# EAGLE board main (EAGLE 9.5.0)
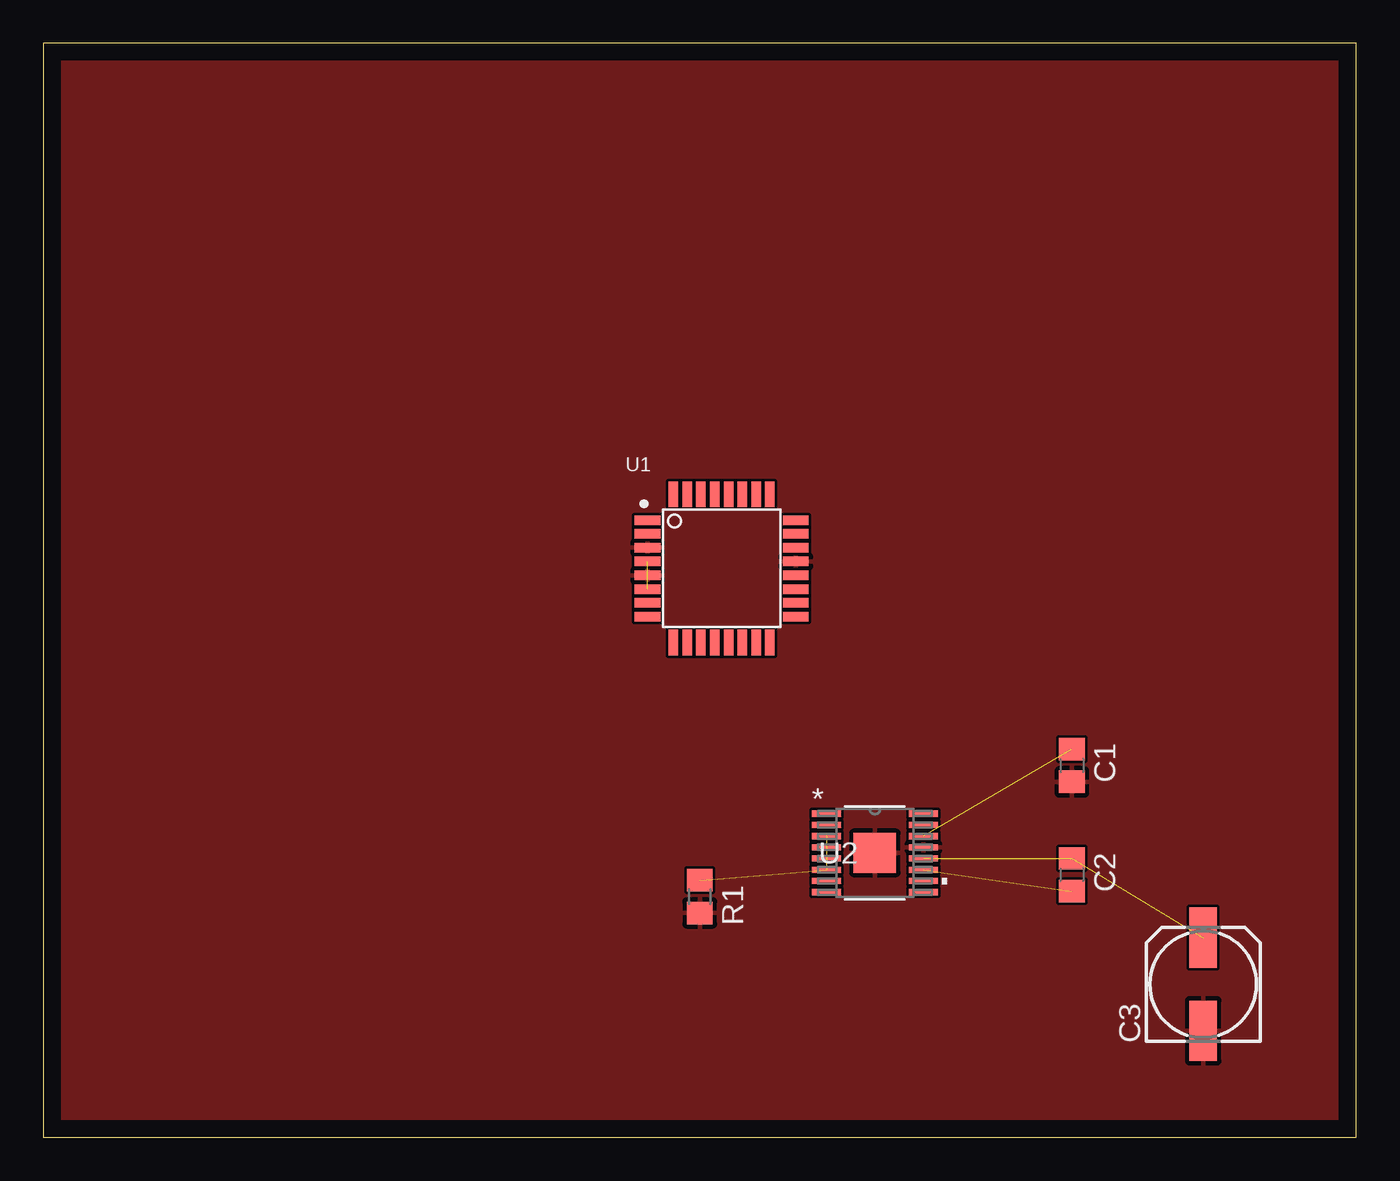
[diagram p0: board, top side]
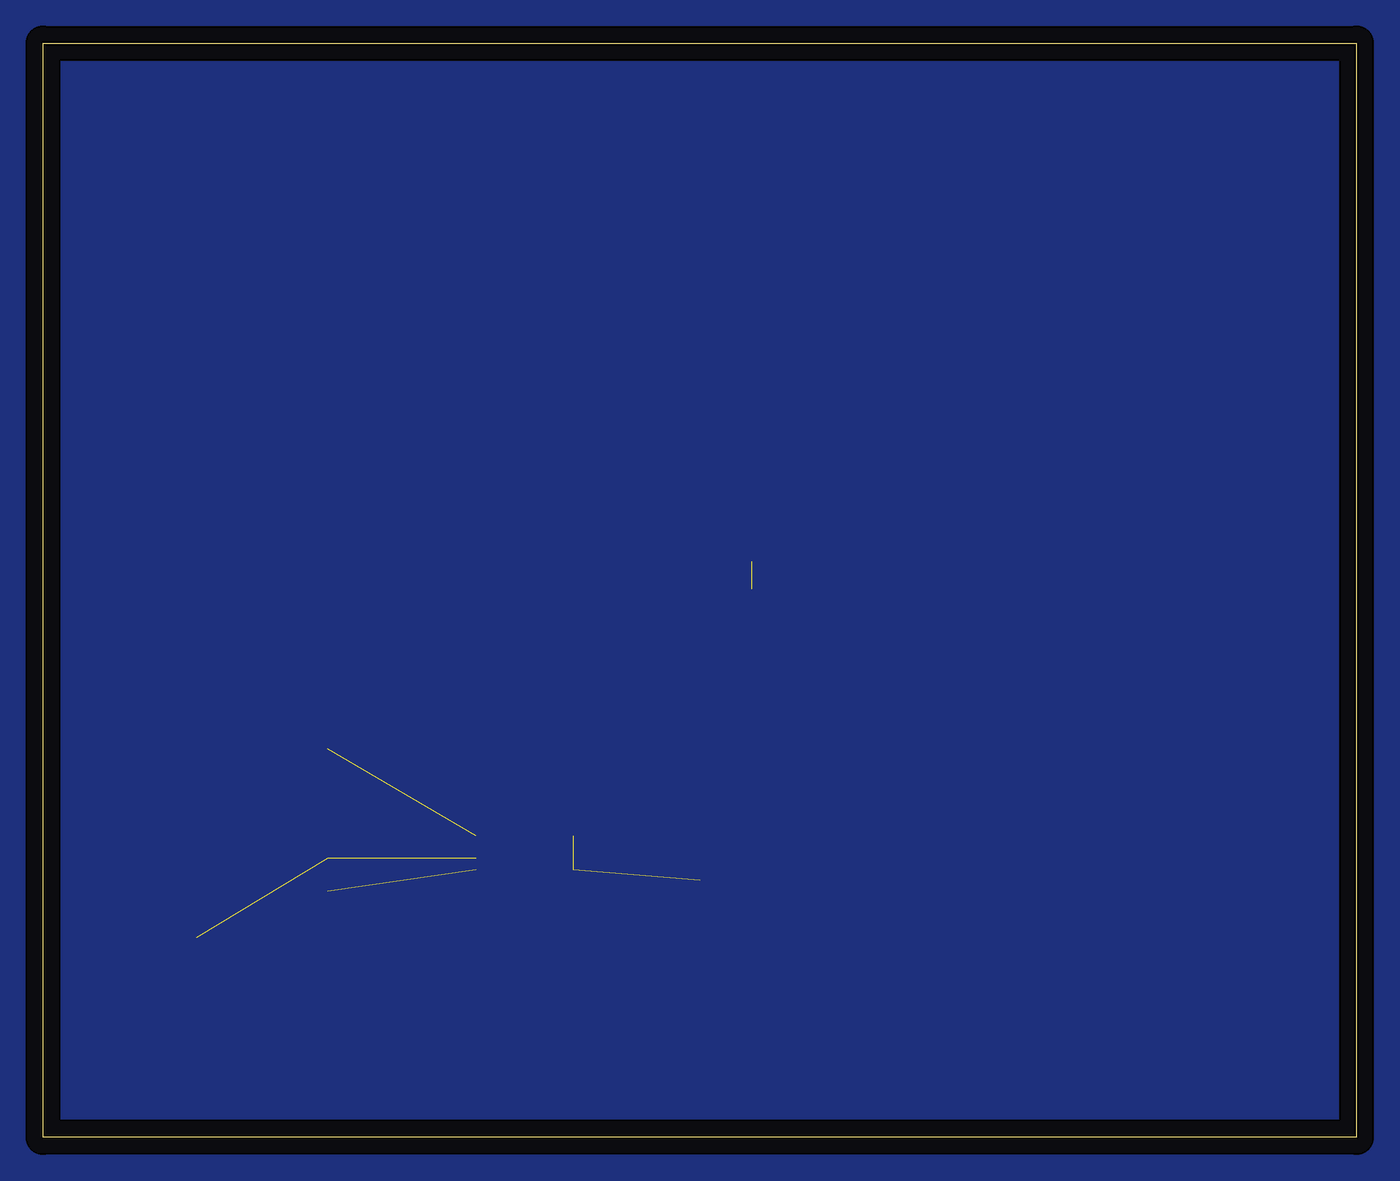
[diagram p1: board, bottom side, seen from below]

Size 76.2 x 63.5 mm. Coordinates in mm from the lower left corner, seen from the top.
Outline: 0,0 76.2,0 76.2,63.5 0,63.5 0,0
Copper layers (1*16): Top 0.035mm / dielectric 1.5mm / Bottom 0.035mm
Design rules "default": minimum track width 6mil, minimum drill 0.35mm, track to track 6mil, track to pad 6mil, pad to pad 6mil, via to via 6mil, smd to smd 6mil, copper to edge 40mil, drill to drill 6mil, minimum pad ring 10mil, minimum via ring 8mil, stop-mask expansion 4mil, vias tented up to drill 0mil, thermal gap 10mil

## Footprints (pad centres in the part's own frame; a part is rotated, then mirrored left to right if it is on the bottom)
C0805 = smd 1.3 x 1.5: 1 -0.95,0; 2 0.95,0
153CLV-0605 = smd 3.5 x 1.6: + 2.7,0; - -2.7,0
R0805 = smd 1.3 x 1.5: 1 -0.95,0; 2 0.95,0
QFP80P900X900X120-32N = smd 1.5 x 0.55: 1 -4.3,2.8; 2 -4.3,2; 3 -4.3,1.2; 4 -4.3,0.4; 5 -4.3,-0.4; 6 -4.3,-1.2; 7 -4.3,-2; 8 -4.3,-2.8; 17 4.3,-2.8; 18 4.3,-2; 19 4.3,-1.2; 20 4.3,-0.4; 21 4.3,0.4; 22 4.3,1.2; 23 4.3,2; 24 4.3,2.8 | smd 0.55 x 1.5: 9 -2.8,-4.3; 10 -2,-4.3; 11 -1.2,-4.3; 12 -0.4,-4.3; 13 0.4,-4.3; 14 1.2,-4.3; 15 2,-4.3; 16 2.8,-4.3; 25 2.8,4.3; 26 2,4.3; 27 1.2,4.3; 28 0.4,4.3; 29 -0.4,4.3; 30 -1.2,4.3; 31 -2,4.3; 32 -2.8,4.3
PWP16_2P31X2P46 = smd 1.676 x 0.356: 1 -2.819,2.275; 2 -2.819,1.625; 3 -2.819,0.975; 4 -2.819,0.325; 5 -2.819,-0.325; 6 -2.819,-0.975; 7 -2.819,-1.625; 8 -2.819,-2.275; 9 2.819,-2.275; 10 2.819,-1.625; 11 2.819,-0.975; 12 2.819,-0.325; 13 2.819,0.325; 14 2.819,0.975; 15 2.819,1.625; 16 2.819,2.275 | smd 2.46 x 2.31: EPAD 0,0
SOT95P284X119-5N = smd 1.27 x 0.533: 1 -1.219,0.94; 2 -1.219,0; 3 -1.219,-0.94; 4 1.219,-0.94; 5 1.219,0.94

## Placement (x,y rotation side)
C1  [C0805]  59.69,21.59 270 top
C2  [C0805]  59.69,15.24 270 top
C3  [153CLV-0605]  67.31,8.89 90 top
R1  0.2  [R0805]  38.1,13.97 270 top
U1  ATMEGA328P-AU  [QFP80P900X900X120-32N]  39.37,33.02 0 top
U2  DRV8833PWPR  [PWP16_2P31X2P46]  48.26,16.51 0 top
U3  LP2985IM5-5.0  [SOT95P284X119-5N]  3.81,-7.62 0 top  (outside the outline)

## Library data of the parts
C1-C3 = rcl; SPICEPREFIX: C
R1 = rcl; SPICEPREFIX: R
U1 = Downloads; DESCRIPTION: Microcontroller Mcu, 8 Bit, Atmega, 20mhz, Tqfp-32; DIGI-KEY_PART_NUMBER: ATMEGA328P-AU-ND; DIGI-KEY_PURCHASE_URL: https://www.digikey.com/product-detail/en/microchip-technology/ATMEGA328P-AU/ATMEGA328P-AU-ND/1832260?utm_source=snapeda&utm_medium=aggregator&utm_campaign=symbol; MF: Microchip; MP: ATMEGA328P-AU; PACKAGE: TQFP-32 Microchip
U2 = Downloads; MANUFACTURER_PART_NUMBER: DRV8833PWPR; VENDOR: Texas Instruments
U3 = LP2985IM5-5.0; DESCRIPTION: Micropower 150-mA Low-Noise Ultra-Low-Dropout Regulator in SOT-23 and DSBGA Packages 5-SOT-23 -40 to 125; DIGI-KEY_PART_NUMBER: LP2985IM5-5.0/NOPBCT-ND; DIGI-KEY_PURCHASE_URL: https://www.digikey.com/product-detail/en/texas-instruments/LP2985IM5-5.0-NOPB/LP2985IM5-5.0-NOPBCT-ND/334983?utm_source=snapeda&utm_medium=aggregator&utm_campaign=symbol; MF: Texas Instruments; MP: LP2985IM5-5.0/NOPB; PACKAGE: SOT-23 Texas Instruments

## Nets
AVCC: U1.18
GND: C1.2 C3.- R1.2 U1.3 U1.5 U1.21 U2.13 U2.EPAD
N$1: C1.1 U2.14
N$2: C2.2 U2.11
N$3: R1.1 U2.3 U2.6
N$4: C2.1 C3.+ U2.12
N$5: U2.9
N$6: U2.10
N$7: U2.15
N$8: U2.16
N$9: U2.1
N$10: U2.8
N$11: U2.2
N$12: U2.4
N$13: U2.5
N$14: U2.7
VCC: U1.4 U1.6
VIN: U3.1

## Tracks (layer width: path | path; a pad name or v marks a point on that pad's centre or on a via)
GND
  pour Top: -1.27,64.77 -1.27,-1.27 77.47,-1.27 77.47,64.77
  pour Bottom: -2.54,66.04 -2.54,-2.54 78.74,-2.54 78.74,66.04
N$1  (1 unrouted)
N$2  (1 unrouted)
N$3  (2 unrouted)
N$4  (2 unrouted)
VCC  (1 unrouted)